# EAGLE board display_board (EAGLE 8.4.0)
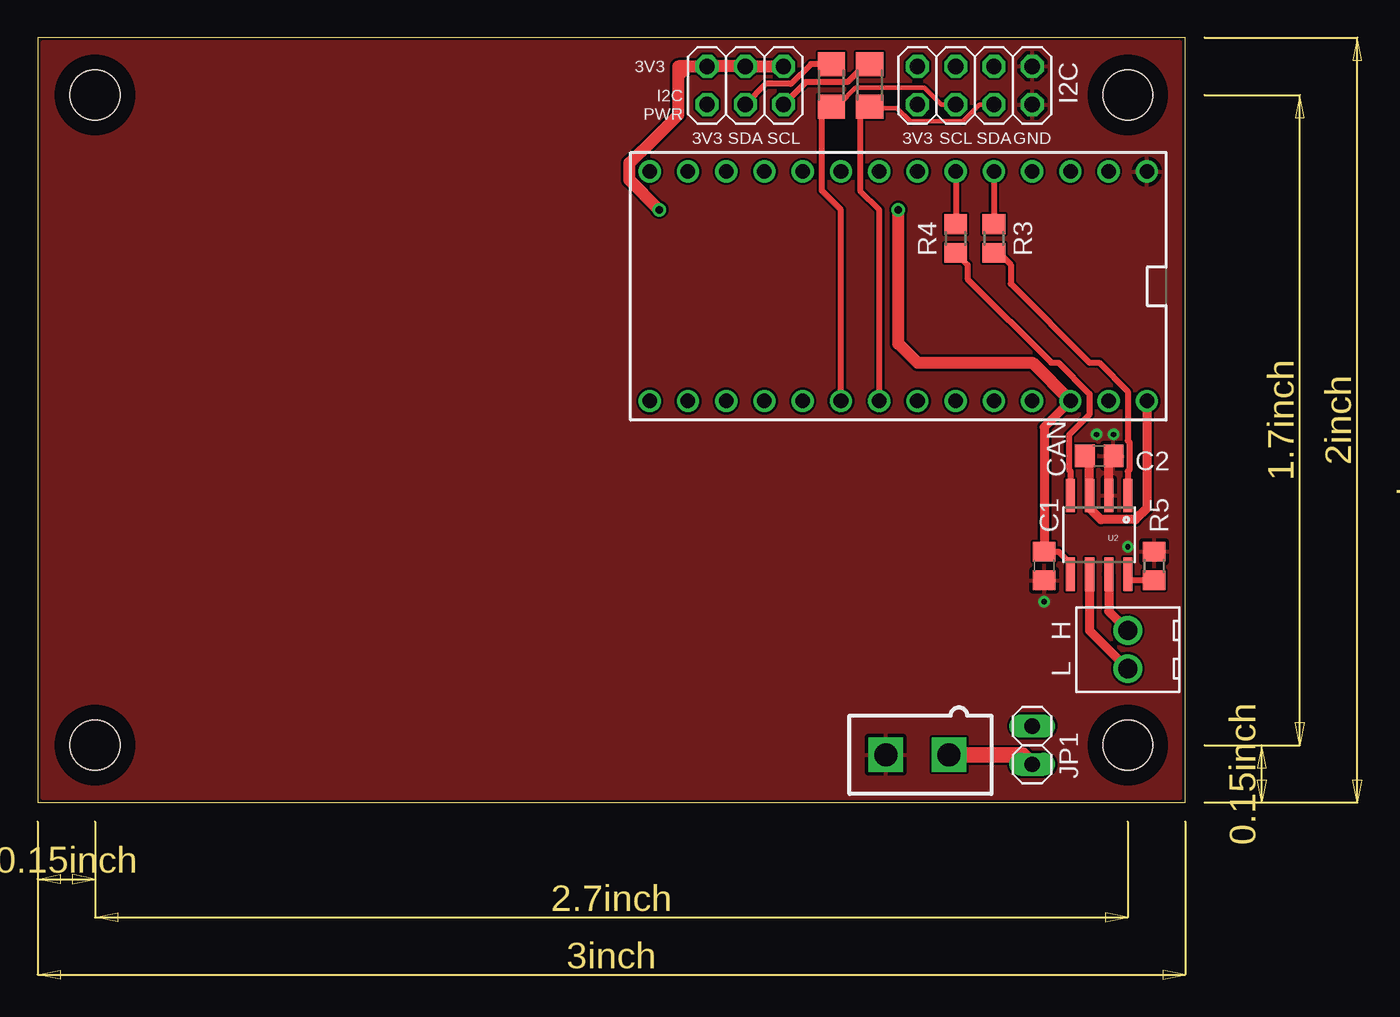
[diagram p0: board, top side]
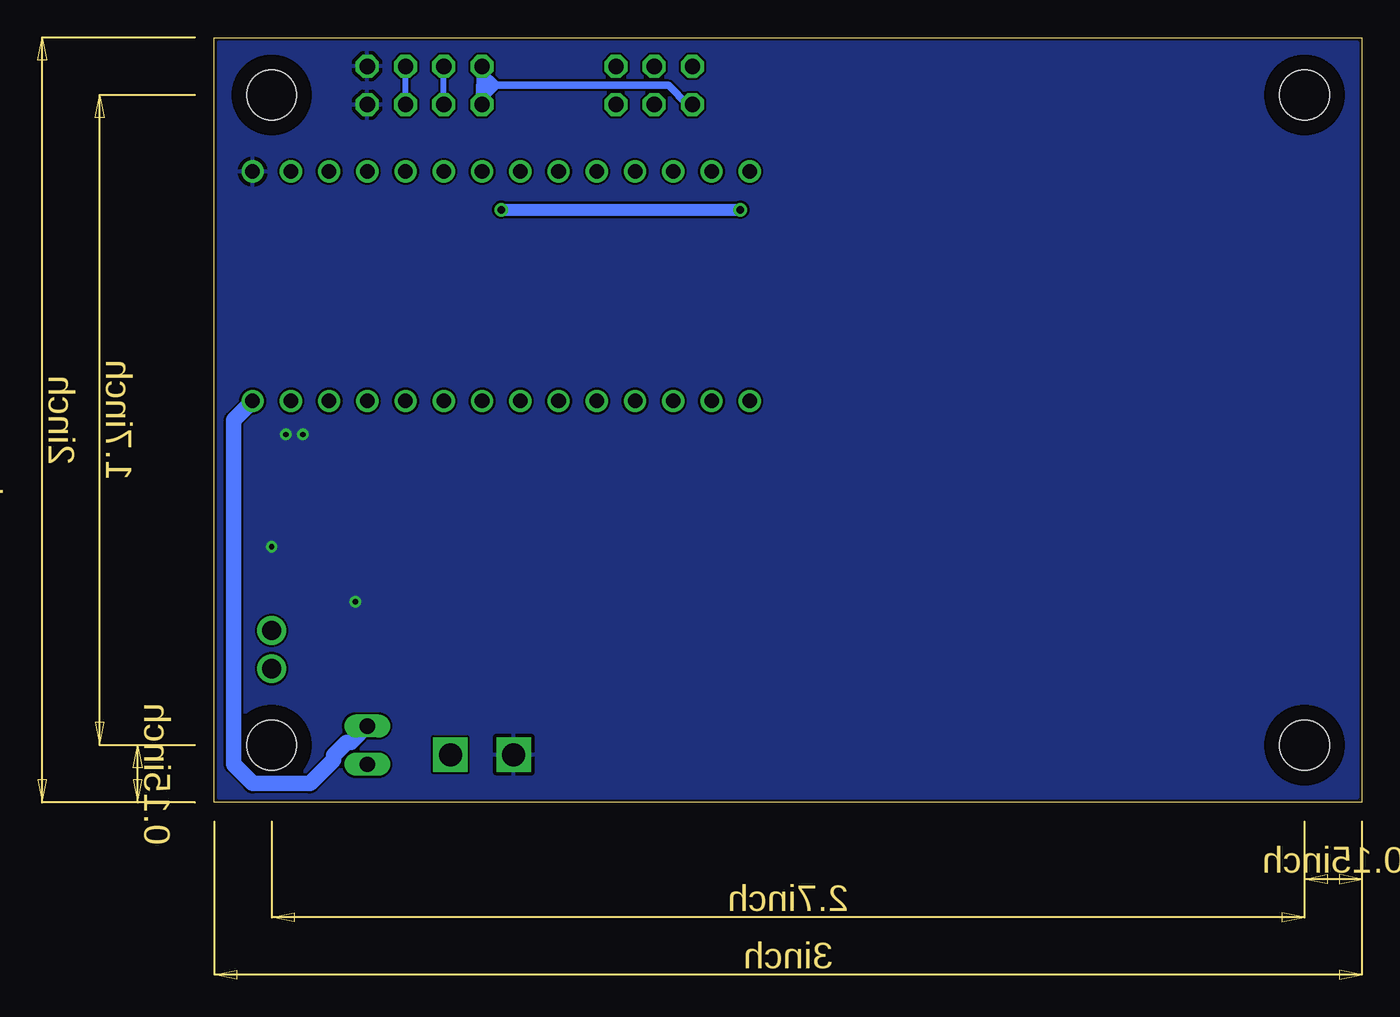
[diagram p1: board, bottom side, seen from below]

Size 87.93 x 62.53 mm. Coordinates in mm from the lower left corner, seen from the top.
Copper layers (1*16): Top 0.035mm / dielectric 1.5mm / Bottom 0.035mm
Design rules "default": minimum track width 6mil, minimum drill 0.35mm, track to track 6mil, track to pad 6mil, pad to pad 6mil, via to via 6mil, smd to smd 6mil, copper to edge 40mil, drill to drill 6mil, minimum pad ring 10mil, minimum via ring 8mil, stop-mask expansion 4mil, vias tented up to drill 0mil, thermal gap 10mil
Net classes: 1 net1: clearance 0.203 mm to class 0
Milling: 4 lines

## Footprints (pad centres in the part's own frame; a part is rotated, then mirrored left to right if it is on the bottom)
C0805 = smd 1.3 x 1.5: 1 -0.95,0; 2 0.95,0
5566-2 = drill 1.524 square: 1 0,-2.095; 2 0,2.095
1X02 = drill 1.016 long: 1 -1.27,0; 2 1.27,0
2X03 = drill 1.016 octagon: 1 -2.54,-1.27; 2 -2.54,1.27; 3 0,-1.27; 4 0,1.27; 5 2.54,-1.27; 6 2.54,1.27
2X04 = drill 1.016 octagon: 1 -3.81,-1.27; 2 -3.81,1.27; 3 -1.27,-1.27; 4 -1.27,1.27; 5 1.27,-1.27; 6 1.27,1.27; 7 3.81,-1.27; 8 3.81,1.27
R1206 = smd 1.6 x 1.803: 1 -1.422,0; 2 1.422,0
R0805 = smd 1.3 x 1.5: 1 -0.95,0; 2 0.95,0
TEENSY_3.1_BASIC_2 = drill 0.965: 0 -7.62,13.97; 1 -7.62,11.43; 2 -7.62,8.89; 3 -7.62,6.35; 3.3V 7.62,11.43; 4 -7.62,3.81; 5 -7.62,1.27; 6 -7.62,-1.27; 7 -7.62,-3.81; 8 -7.62,-6.35; 9 -7.62,-8.89; 10 -7.62,-11.43; 11 -7.62,-13.97; 12 -7.62,-16.51; 13 7.62,-16.51; 14/A0 7.62,-13.97; 15/A1 7.62,-11.43; 16/A2 7.62,-8.89; 17/A3 7.62,-6.35; 18/A4 7.62,-3.81; 19/A5 7.62,-1.27; 20/A6 7.62,1.27; 21/A7 7.62,3.81; 22/A8 7.62,6.35; 23/A9 7.62,8.89; AGND 7.62,13.97; GND -7.62,16.51; VIN 7.62,16.51
SOIC8 = smd 0.61 x 2.21: 1 -1.905,-2.616; 2 -0.635,-2.616; 3 0.635,-2.616; 4 1.905,-2.616; 5 1.905,2.616; 6 0.635,2.616; 7 -0.635,2.616; 8 -1.905,2.616
STAND-OFF = hole 3.302: 0,0
OSTVN02A150 = drill 1.27: P$1 -1.27,0; P$2 1.27,0

## Placement (x,y rotation side)
C1  10u  [C0805]  66.83,27.45 270 top
C2  10u  [C0805]  70.48,34.75 0 top
CON1  MOLEX_5566-2  [5566-2]  58.42,14.91 90 top
JP1  [1X02]  66.04,15.54 270 top
JP2  [2X03]  46.99,59.36 180 top
JP3  [2X04]  62.23,59.36 180 top
R1  10k  [R1206]  55.24,59.36 270 top
R2  10k  [R1206]  52.7,59.36 270 top
R3  220  [R0805]  63.5,49.2 270 top
R4  220  [R0805]  60.96,49.2 270 top
R5  1k  [R0805]  74.14,27.45 270 top
U1  TEENSY_3.1_BASIC_2  [TEENSY_3.1_BASIC_2]  57.15,46.02 270 top
U2  TCAN1042HVDR  [SOIC8]  70.48,29.51 180 top
U$1  [STAND-OFF]  72.39,15.54 0 top
U$2  [STAND-OFF]  3.81,15.54 0 top
U$3  [STAND-OFF]  3.81,58.72 0 top
U$4  [STAND-OFF]  72.39,58.72 0 top
X1  OSTVN02A150  [OSTVN02A150]  72.39,21.89 90 top

## Library data of the parts
C1 C2 R1-R5 = rcl
CON1 U2 = ARVP
JP1-JP3 = pinhead
U1 = Teensy_3_Series_Board_v1.0
U$1-U$4 = SparkFun
X1 = dropper_torpedo_v3

## Nets
+3V3: C1.1 JP2.1 JP2.3 JP2.5 U1.3.3V U2.5
+5V: CON1.1 JP1.2
AGND: U1.AGND
CAN_RX: R4.2 U2.4
CAN_RX_T: R4.1 U1.4
CAN_TX: R3.2 U2.1
CAN_TX_T: R3.1 U1.3
CANH: U2.7 X1.P$2
CANL: U2.6 X1.P$1
GND [net1]: C1.2 C2.2 CON1.2 JP3.1 JP3.2 R5.1 U1.GND U2.2
I2_3V3: JP2.6 JP3.7 JP3.8
PCA_OE: U1.11
SCL: JP3.5 JP3.6 R2.2 U1.18/A4
SCL_3V3: JP2.2 R1.1
SDA: JP3.3 JP3.4 R1.2 U1.19/A5
SDA_3V3: JP2.4 R2.1
STB: R5.2 U2.8
TRP0: U1.16/A2
TRP1: U1.17/A3
VIN: C2.1 JP1.1 U1.VIN U2.3

## Tracks (layer width: path | path; a pad name or v marks a point on that pad's centre or on a via)
+3V3  (via drill 0.5)
  Top 0.406: C1.1 67.79,28.4 68.58,27.61 U2.5
  Top 0.61: U1.3.3V 66.83,36.65 C1.1
  Top 0.813: JP2.1 JP2.3 JP2.5 43.18,60.63 | 42.54,59.99 42.54,57.41 40.12,54.99 40.08,54.99 39.29,54.2 39.29,53.08 v41.27,51.1 | 42.54,59.99 42.54,60.63 43.18,60.63 | 42.54,59.99 43.18,60.63 | U1.3.3V 66.04,40.94 58.42,40.94 57.15,42.21 v57.15,51.1
  Bottom 0.813: v57.15,51.1 v41.27,51.1
+5V
  Top 1.016: CON1.1 65.41,14.91 JP1.2
CAN_RX
  Top 0.406: R4.2 61.75,47.45 61.75,46.5 67.31,40.94 67.79,40.94 69.85,38.88 69.85,37.52 68.48,36.14 68.48,33.83 68.58,33.73 U2.4 68.58,33
CAN_RX_T
  Top 0.406: U1.4 R4.1
CAN_TX
  Top 0.406: R3.2 63.82,48.25 64.61,47.45 64.61,46.18 69.85,40.94 70.48,40.94 72.39,39.04 72.39,35.77 72.49,35.67 72.49,33.83 72.39,33.73 U2.1
CAN_TX_T
  Top 0.406: U1.3 R3.1
CANH
  Top 0.61: U2.7 71.12,24.43 X1.P$2
CANL
  Top 0.61: U2.6 69.85,23.16 X1.P$1
GND  (via drill 0.35)
  Top 0.61: U2.2 71.12,34.43 C2.2
  other vias: 66.83,25.07 72.39,28.72 70.33,36.18 71.44,36.18
  pour Bottom (rank 2): 0.32,12.05 75.88,12.05 75.88,62.21 0.32,62.21
  pour Top (rank 3): 0.32,12.05 75.88,12.05 75.88,62.21 0.32,62.21
I2_3V3
  Bottom 0.508: JP2.6 44.77,58.09 46.04,59.36 58.42,59.36 | 58.42,60.31 57.47,59.36 58.42,58.4
  Bottom 0.813: JP3.7 58.42,60.31 58.42,59.36 58.42,58.4 JP3.8
SCL
  Top 0.305: R2.2 52.86,58.09 53.19,58.09 54.31,59.2 58.88,59.2 60,58.09 JP3.6
  Top 0.406: U1.18/A4 53.34,51.1 52.07,52.37 52.07,57.3 R2.2
  Bottom 0.406: JP3.6 JP3.5
SCL_3V3
  Top 0.406: R1.1 54.98,60.78 53.77,59.57 51.02,59.57 JP2.2
SDA
  Top 0.305: JP3.4 62.54,58.09 61.42,56.97 57.96,56.97 57.07,57.85 55.16,57.85
  Top 0.406: U1.19/A5 55.88,51.1 54.61,52.37 54.61,57.3 55.16,57.85 R1.2
  Bottom 0.406: JP3.4 JP3.3
SDA_3V3
  Top 0.406: R2.1 51.33,60.78 50.01,59.46 48.36,59.46 JP2.4
STB
  Top 0.406: R5.2 72.55,26.5 72.39,26.34 U2.8
VIN
  Top 0.406: 69.85,31.42 U2.3
  Top 0.61: C2.1 69.85,34.43 U2.3 69.85,31.26 69.86,31.26 70.6,30.51 72.91,30.51 73.66,31.27 U1.VIN
  Bottom 1.016: JP1.1 67.11,15.74 67.41,15.74 68.28,14.88 68.28,14.58 69.85,13 73.66,13 74.93,14.27 74.93,37.13 U1.VIN

## Text on the board
Dimension: Assumptions: this board is installed in right/rear or left/front section of robot. / Teensy USB connector and CAN terminal should point towards the center of hull. / Mounting holes come from Sparkfun library, located in projects folder. / Layout can be changed if needed, as long as USB and CAN guidelines are followed. | Towards acrylic wall | Towards middle of robot | Bottom
tNames: 3V3 | I2C | I2C / PWR | 3V3 | SDA | SCL | 3V3 | SCL | SDA | GND | CAN | H | L